# Altium PCB obc_comm.PcbDoc (part 3 of 3)
Units mm, origin at the board's own origin, x right, y up, seen from the top; angles counter-clockwise.
Board outline 95.89 x 90.17 mm, 4 copper layers (Top Signal, Ground Plane, Power Plane, Bottom Signal), stack 0.844 mm thick; 224 components, 179 nets, 944 pads, 422 vias.
Unrouted connection lines stored in the file: 347.
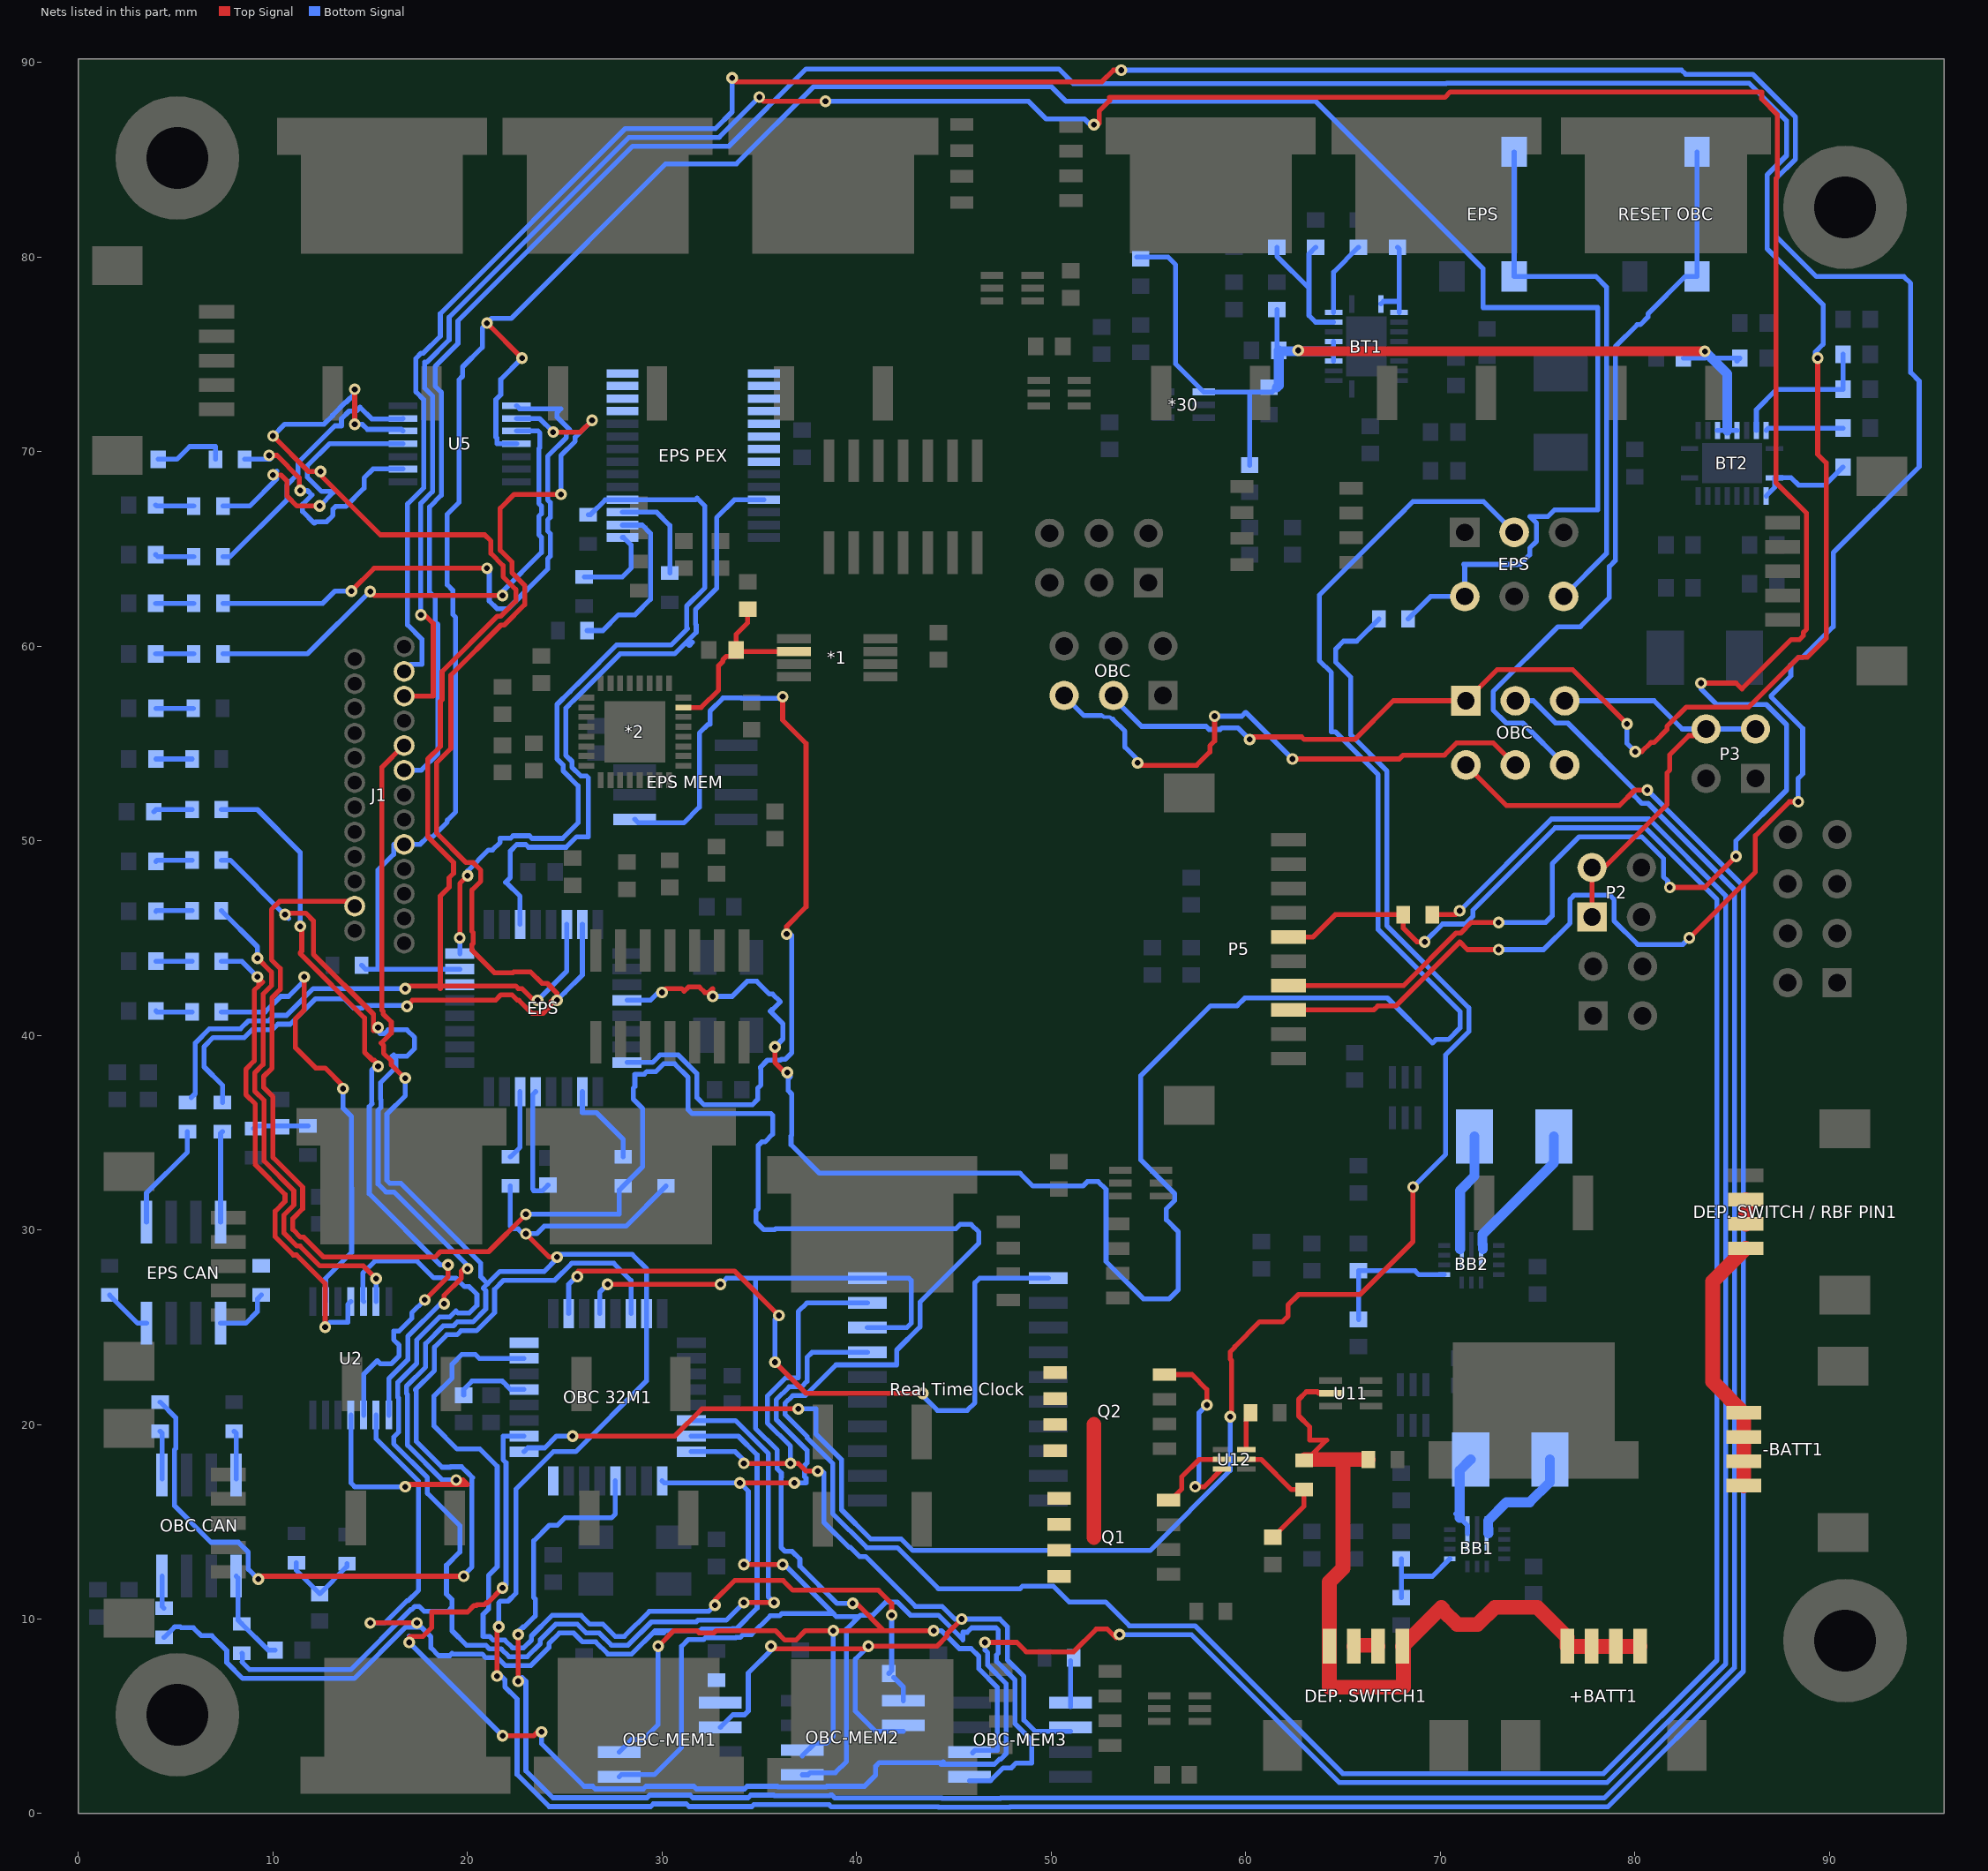
[diagram p5: the nets of this part, all layers, seen from the top]

## Via types
v1: diameter 0.6, hole 0.3, Top Signal to Bottom Signal, 390 vias
v2: diameter 1.27, hole 0.711, Top Signal to Bottom Signal, 24 vias
v3: diameter 1, hole 0.5, Top Signal to Bottom Signal, 6 vias
v4: diameter 2.794, hole 2.794, Top Signal to Bottom Signal, 2 vias

## Nets (pads, with @x,y where several pads share a name; then routed paths per layer and width w, separated by ;. In a path a pad name is that pad's centre, name@x,y a point inside that pad or via, vN(x,y) a via of type N, cw(c..) or ccw(c..) an arc to the next point about the centre after c; other vN are vias at no path point) (continued)
Net*30_4: 1.1 4.2 5.2 7.2 13.2 14.2 16.2 *30.4 BT1.14 BT1.15 BT1.16 BT2.14 BT2.15 BT2.16 | length 53.9
  Top Signal w0.508: v1(62.7,75.2) 62.75,75.15 v1(83.6,75.15)
  Bottom Signal w0.254: 14.2@54.4,80 56,80 56.4,79.6 56.4,74.502 *30.4@57.841,73.06 61.36,73.06 7.2@61.6,73.3 ; 5.2@60.2,69.3 60.2,73.06 ; 4.2@61.6,77.3 61.6,75.3 1.1@61.7,75.2 ; BT1.14@64.515,74.65 BT1.15@64.515,75.15 BT1.16@64.515,75.65 ; 16.2@82.5,74.8 83.6,74.8 ; 83.95,74.8 13.2@85.4,74.8 13.2@85.25,74.65 ; BT2.14@84.25,71.085 BT2.15@84.75,71.085 BT2.16@85.25,71.085
  Bottom Signal w0.508: 7.2@61.6,73.3 61.7,73.4 1.1@61.7,75.2 ; 1.1@61.85,75.15 v1@62.6,75.15 ; v1@62.6,75.2 v1(62.7,75.2) ; v1@62.7,75.15 BT1.15@64.515,75.15 ; v1(83.6,75.15) 83.95,74.8 84.75,74 BT2.15@84.75,71.085
Net+BATT1_1: "DEP. SWITCH1.1" "DEP. SWITCH1.4" +BATT1.1 +BATT1.2 +BATT1.3 +BATT1.4 R44.2 R45.2 U11.5 | length 42.7
  Top Signal w0.254: R45.2@63,18.15 63.05,18.2 63.163,18.2 64.163,19.2 63.281,19.2 63.281,19.882 62.719,20.444 62.719,21.282 63.118,21.681 63.682,21.681 63.763,21.6 U11.5@64.359,21.6
  Top Signal w0.762: R45.2@63.05,18.2 65,18.2 ; R44.2@66.3,18.2 65,18.2 ; +BATT1.1@80.275,8.6 +BATT1.2@79.025,8.6 +BATT1.3@77.775,8.6 +BATT1.4@76.525,8.6 76.525,9.075 75,10.6 72.796,10.6 71.916,9.72 70.864,9.72 70.12,10.464 70.12,10.53 70.05,10.6 68.05,8.6 68.1,8.55 68.1,6.5 64.3,6.5 64.3,8.6 64.3,11.9 65,12.6 65,18.2
Net-BATT1_1: "DEP. SWITCH / RBF PIN1.4" -BATT1.1 -BATT1.2 -BATT1.3 -BATT1.4 | length 13.6
  Top Signal w0.762: -BATT1.4@85.6,16.85 -BATT1.3@85.6,18.1 -BATT1.2@85.6,19.35 -BATT1.1@85.6,20.6 84,22.2 84,27.35 85.7,29.05
NetBB1_1: BB1.1 L1.2 | length 4.5
  Bottom Signal w0.254: 70.8,15.4 71,15.2 71.4,14.8 BB1.1@71.4,14.4
  Bottom Signal w0.508: 71,15.2 71,17.637 L1.2@71.563,18.2
NetBB1_3: BB1.3 L1.1 | length 5.8
  Bottom Signal w0.508: BB1.3@72.471,14.4 72.471,14.641 72.454,14.658 72.454,15.054 73.4,16 74.6,16 75.637,17.037 L1.1@75.637,18.2
NetBB1_11: BB1.11 Rfbb1.2 Rfbt1.2 | length 4.9
  Bottom Signal w0.254: Rfbb1.2@68,11.1 68,12.2 ; Rfbt1.2@68,13.1 68,12.2 ; BB1.11@70.49,13.095 69.595,12.2 68,12.2
NetBB2_1: BB2.1 L2.2 | length 6.1
  Bottom Signal w0.508: BB2.1@71.019,29 71.019,32.019 71.763,32.763 L2.2@71.763,34.8
NetBB2_3: BB2.3 L2.1 | length 7.3
  Bottom Signal w0.508: BB2.3@72.181,29 72.181,29.241 72.164,29.258 72.164,29.764 75.837,33.437 L2.1@75.837,34.8
NetBB2_11: BB2.11 Rfbb2.2 Rfbt2.2 | length 7
  Bottom Signal w0.254: Rfbb2.2@65.8,25.4 Rfbt2.2@65.8,27.9 68.7,27.9 68.905,27.695 BB2.11@70.2,27.695
NetBT1_1: BT1.1 BT1.2 CvccA1.2 | length 4.4
  Bottom Signal w0.254: BT1.1@66.95,77.585 67.08,77.715 67.885,77.715 ; CvccA1.2@67.8,80.5 67.885,80.415 67.885,77.715 ; BT1.2@67.885,77.15 67.885,77.715
NetBT1_18: BT1.18 Ccomp1.2 RcompA1.2 | length 7.9
  Bottom Signal w0.254: RcompA1.2@61.6,80.5 61.6,80.042 63.254,78.388 ; Ccomp1.2@63.6,80.5 63.254,80.154 63.254,78.388 ; BT1.18@64.515,76.65 63.592,76.65 63.254,76.988 63.254,78.388
NetBT1_19: BT1.19 RlimA1.2 | length 3.9
  Bottom Signal w0.254: BT1.19@64.515,77.15 64.515,79.215 RlimA1.2@65.8,80.5
NetBT2_1: BT2.1 BT2.2 CvccA2.2 | length 5.2
  Bottom Signal w0.254: BT2.2@86.75,67.715 87.185,68.15 BT2.1@87.185,68.65 88.037,68.65 88.418,68.269 89.769,68.269 CvccA2.2@90.7,69.2
NetBT2_18: BT2.18 Ccomp2.2 RcompA2.2 | length 7.7
  Bottom Signal w0.254: BT2.18@86.25,71.085 86.25,72.15 87.3,73.2 Ccomp2.2@90.7,73.2 RcompA2.2@90.7,75
NetBT2_19: BT2.19 RlimA2.2 | length 4
  Bottom Signal w0.254: BT2.19@86.75,71.085 86.865,71.2 RlimA2.2@90.7,71.2
NetC19_1: "OBC 32M1.21" C19.1 | length 3.8
  Bottom Signal w0.254: C19.1@19.8,21.5 19.8,21.8 20.227,22.227 21.785,22.227 22,22.012 22,22 22.2,21.8 22.9,21.8
NetC25_1: C25.1 EPS.21 | length 6
  Bottom Signal w0.254: EPS.21@23.5,37.1 23.356,36.956 23.356,32.1 23.4,32.056 23.4,32 23.833,32 C25.1@24.133,32.3
NetC33_2: C33.2 R28.2 R31.2 | length 4.2
  Bottom Signal w0.254: R28.2@11.2,12.9 11.2,12.5 C33.2@12.4,11.3 13.8,12.7 R31.2@13.8,12.85
NetC38_2: C38.2 R35.2 R38.2 | length 2.9
  Bottom Signal w0.254: R38.2@9,35.2 9.15,35.35 R35.2@11.8,35.35
NetC44_2: C44.2 R45.1 U12.5 | length 6.7
  Top Signal w0.254: U12.5@60.03,18.2 60.8,18.2 62.35,16.65 R45.1@63,16.65 63,15.8 C44.2@61.4,14.2
NetD1_2: "OBC RST.2" R2.2 | length 2
  Bottom Signal w0.254: 3.878,51.49 3.988,51.6 R2.2@5.85,51.6
NetD2_2: "OBC RXCAN.2" R3.2 | length 1.9
  Bottom Signal w0.254: 3.978,48.93 4.048,49 R3.2@5.85,49
NetD3_2: "OBC TXCAN.2" R4.2 | length 1.9
  Bottom Signal w0.254: 3.978,46.37 4.008,46.4 R4.2@5.85,46.4
NetD4_2: "OBC RX.2" "OBC TX.2"@3.978,41.25 R5.2 R6.2 | length 3.8
  Bottom Signal w0.254: 3.978,41.25 4.028,41.2 R6.2@5.85,41.2 ; 3.978,43.81 3.988,43.8 R5.2@5.85,43.8
NetD6_1: 3V3.1 R7.2 | length 1.9
  Bottom Signal w0.254: 3V3.1@3.978,54.2 R7.2@5.85,54.2
NetD7_2: "EPS RST.2" R15.2 | length 1.9
  Bottom Signal w0.254: 3.973,59.6 R15.2@5.923,59.6
NetD8_2: "EPS RXCAN.2" R16.2 | length 1.9
  Bottom Signal w0.254: 3.973,62.2 R16.2@5.923,62.2
NetD9_2: "EPS TXCAN.2" R17.2 | length 2
  Bottom Signal w0.254: 3.973,64.7 4.073,64.6 R17.2@5.923,64.6
NetD10_2: "EPS RX.2" R18.2 | length 2
  Bottom Signal w0.254: 3.973,67.25 4.023,67.2 R18.2@5.923,67.2
NetD11_2: "EPS TX.2" R19.2 | length 3.9
  Bottom Signal w0.254: 4.1,69.6 5.062,69.6 5.718,70.256 7.05,70.256 R19.2@7.05,69.6
NetD12_1: 5V.2 D12.1 | length 1.9
  Bottom Signal w0.254: D12.1@3.978,56.8 5V.2@5.9,56.8
"NetDEP. SWITCH1_2": "DEP. SWITCH1.2" "DEP. SWITCH1.3" | length 1.3
  Top Signal w0.762: 65.55,8.6 65.6,8.65 66.75,8.65 66.8,8.6
"NetDEP. SWITCH / RBF PIN1_2": "DEP. SWITCH / RBF PIN1.2" "DEP. SWITCH / RBF PIN1.3" | length 1.3
  Top Signal w0.762: 85.7,30.3 85.7,31.55
NetQ1_2: Q1.2 U12.2 | length 4
  Top Signal w0.254: Q1.2@56.025,16.105 56.025,16.203 56.24,16.203 56.719,16.682 56.719,17.319 57.6,18.2 U12.2@58.77,18.2
NetQ1_3: Q1.3 Q2.3 | length 5.8
  Top Signal w0.762: 52.2,14.2 52.2,20
NetQ2_2: Q2.2 U12.3 | length 9.5
  Top Signal w0.254: Q2.2@55.819,22.565 57.235,22.565 58,21.8 v1(58,21) ; v1(57.4,16.8) 57.87,16.8 U12.3@58.77,17.7
  Bottom Signal w0.254: v1(57.4,16.8) 57.6,17 57.6,20.6 v1(58,21)
NetR2_1: R2.1 U2.10 | length 40.9
  Top Signal w0.254: v1(11.4,45.6) 11.481,45.519 11.481,44.318 11.4,44.237 11.4,44.2 14.708,40.892 14.708,39.129 15.118,38.719 15.205,38.719 15.4,38.524 v1(15.4,38.4) ; v1(17.8,26.4) 19,27.6 v1(19,28.2)
  Bottom Signal w0.254: R2.1@7.35,51.6 9.2,51.6 11.4,49.4 v1(11.4,45.6) ; U2.10@14.66,20.479 14.66,22.576 15.36,23.276 15.518,23.119 16.082,23.119 16.481,23.518 16.481,24.082 16.2,24.363 16.2,24.8 16.203,24.803 16.484,24.803 17.133,25.452 17.133,25.733 v1(17.8,26.4) ; v1(15.4,38.4) 15.4,38.537 15.065,38.202 15.065,36.53 15.092,36.503 15.092,36.476 14.947,36.332 14.947,31.853 18.6,28.2 v1(19,28.2)
NetR3_1: R3.1 U2.8 | length 40.9
  Top Signal w0.254: v1(10.616,46.2) 10.616,46.216 10.681,46.281 11.682,46.281 12.081,45.882 12.081,44.161 15.162,41.08 15.162,40.238 15.238,40.238 v1(15.4,40.4) ; v1(18.8,26.2) 18.8,26.637 19.681,27.518 19.681,27.881 19.8,28 v1(20,28)
  Bottom Signal w0.254: R3.1@7.35,49 7.8,49 10.6,46.2 v1(10.616,46.2) 10.616,46.184 v1@10.8,46 ; v1(15.4,40.4) 15.4,40.2 15.519,40.081 15.718,40.081 15.918,40.281 16.882,40.281 17.281,39.882 17.281,39.318 16.881,38.918 16.119,38.918 ; U2.8@15.956,20.479 15.956,22.351 16.935,23.33 16.935,24.535 18.6,26.2 v1(18.8,26.2) ; 16.2,39 16.2,38.837 16.308,38.729 16.308,38.345 15.519,37.556 15.519,36.718 15.546,36.691 15.546,36.288 15.401,36.144 15.401,32.356 15.812,31.946 16.217,31.946 20,28.163 v1(20,28)
NetR4_1: R4.1 U2.6 | length 25.9
  Top Signal w0.254: v1(9.2,43.963) 9.919,43.244 9.919,42.547 9.492,42.12 9.492,38.497 9.065,38.07 9.065,37.13 9.546,36.649 9.546,33.533 11.07,32.009 11.07,31.275 10.565,30.77 10.565,29.83 11.23,29.165 11.393,29.165 12.412,28.146 14.645,28.146 v1(15.295,27.495)
  Bottom Signal w0.254: R4.1@7.35,46.4 9.2,44.55 v1(9.2,43.963) ; U2.6@15.295,26.321 v1(15.295,27.495)
NetR5_1: R5.1 U2.4 | length 25.3
  Top Signal w0.254: v1(9.2,43) 9.465,42.735 9.384,42.654 9.277,42.654 9.277,42.547 9.038,42.308 9.038,38.685 8.611,38.258 8.611,36.942 9.092,36.461 9.092,33.345 10.616,31.821 10.616,31.463 10.111,30.958 10.111,29.642 11.042,28.711 11.205,28.711 12.679,27.237 v1(12.679,25)
  Bottom Signal w0.254: R5.1@7.35,43.8 8.4,43.8 v1(9.2,43) ; v1(12.679,25) 12.936,25.257 13.844,25.257 13.844,26.165 U2.4@14,26.321
NetR6_1: R6.1 U2.2 | length 24
  Top Signal w0.254: 11.152,39.352 11.152,40.836 11.6,41.284 v1(11.6,43) ; 11.158,39.358 12.194,38.322 12.678,38.322 13.6,37.4 v1(13.6,37.258)
  Bottom Signal w0.254: R6.1@7.35,41.2 9.6,41.2 10.4,42 10.8,42 11.6,42.8 v1(11.6,43) ; U2.2@12.705,26.321 12.705,27.505 14.039,28.839 14.039,32.147 14.031,32.156 14.031,35.823 13.6,36.255 v1(13.6,37.258)
NetR8_2: "OBC 32M1.17" R8.2 | length 99.8
  Top Signal w0.254: v1(25.4,19.4) 30.647,19.4 32.047,20.8 v1(37,20.8) ; v1(59.2,20.4) 59.281,20.481 59.281,23.282 59.2,23.363 59.2,23.726 59.437,23.963 59.437,24 60.718,25.281 61.893,25.281 62.177,25.565 62.177,26.14 62.718,26.681 65.881,26.681 68.6,29.4 v1(68.6,32.2)
  Bottom Signal w0.254: 22.9,18.6 23.098,18.798 23.968,18.798 24.57,19.4 v1(25.4,19.4) ; v1(37,20.8) 37.908,20.8 37.908,19.505 39.223,18.19 39.223,15.614 40.714,14.123 42.282,14.123 42.886,13.519 55.082,13.519 59.2,17.637 v1(59.2,20.4) ; R8.2@66.85,61.4 65.704,60.254 65.109,60.254 65.027,60.254 64.628,59.855 64.628,59.172 65.4,58.4 65.4,55.442 67.254,53.588 67.254,45.625 71.47,41.409 71.47,40.191 70.278,38.999 70.278,33.878 v1(68.6,32.2)
NetR9_2: "OBC 32M1.18" R9.2 | length 160.7
  Top Signal w0.254: v1(17,8.8) 17,9.053 17.055,9.108 17.708,9.108 18.162,9.562 18.162,10.362 19.999,10.362 20.337,10.7 20.458,10.7 20.493,10.735 20.869,10.735 20.988,10.854 21.021,10.821 v1(21.8,11.6) ; v1(21.8,4) 23.4,4 23.6,4.2 v1(23.8,4.2) ; v1(46.6,8.8) 48.237,8.8 48.718,8.319 51.156,8.319 52.318,9.481 52.882,9.481 53.336,9.027 v1(53.509,9.2) ; R9.2@69.6,46.2 70.8,46.2 v1(71,46.4)
  Bottom Signal w0.254: 17,9.126 v1(17,8.8) v1(21.8,4) ; v1(21.8,11.6) 21.977,11.777 21.977,18.035 21.823,18.19 21.823,19.4 22.9,19.4 ; v1(23.8,4.2) 23.8,3.6 25.994,1.406 26.427,1.406 26.565,1.268 29.035,1.268 29.173,1.406 31.627,1.406 31.765,1.268 34.235,1.268 34.302,1.335 34.373,1.406 35.927,1.406 35.965,1.368 38.435,1.368 38.473,1.406 40.406,1.406 40.973,1.973 40.973,2.43 41.165,2.622 44.422,2.622 44.451,2.651 ; 44.338,2.538 47.081,2.538 47.351,2.808 47.415,2.808 47.681,3.074 47.681,6.682 46.735,7.628 46.735,8.27 46.6,8.405 v1(46.6,8.8) ; v1(53.509,9.2) 57.2,9.2 64.8,1.6 78.58,1.6 84.67,7.69 84.67,47.174 80.731,51.113 75.713,51.113 v1(71,46.4)
NetR10_2: "EPS PEX.18" EPS.32 R10.2 | length 39.4
  Top Signal w0.254: v1(19.6,45) 19.6,47.8 v1(20,48.2)
  Bottom Signal w0.254: EPS.32@19.6,44.2 v1(19.6,45) ; v1(20,48.2) 20,48.442 21.077,49.519 21.282,49.519 21.681,49.918 21.681,50.123 22.212,50.123 22.343,50.254 23.183,50.254 23.318,50.119 24.882,50.119 25.681,50.918 25.681,52.823 24.915,53.588 24.915,53.885 24.6,54.2 24.6,57 25.265,57.665 25.27,57.665 25.935,58.33 25.935,58.335 27.654,60.054 30.454,60.054 31.297,60.897 31.265,60.93 31.265,62.07 32.2,63.005 32.2,67.2 31.8,67.6 31.714,67.514 27.968,67.514 27.077,67.514 26.313,66.75 R10.2@26.2,66.75
NetR11_2: "EPS PEX.15" R11.2 | length 4.4
  Bottom Signal w0.254: R11.2@26,63.55 27.95,63.55 28.4,64 28.4,65.2 28.016,65.584 27.968,65.584
NetR12_2: "EPS PEX.16" R12.2 | length 8.9
  Bottom Signal w0.254: R12.2@26.15,60.8 26.958,60.8 27.77,61.612 28.612,61.612 29.4,62.4 29.4,65.8 28.981,66.219 27.968,66.219
NetR13_2: "EPS PEX.17" R13.2 | length 5.2
  Bottom Signal w0.254: 27.968,66.879 29.721,66.879 30.4,66.2 R13.2@30.4,63.75
NetR15_1: R15.1 U5.10 | length 26.4
  Top Signal w0.254: v1(15,62.8) 15.2,62.6 v1(21.8,62.6)
  Bottom Signal w0.254: R15.1@7.423,59.6 11.763,59.6 14.963,62.8 v1(15,62.8) ; v1(21.8,62.6) 21.8,62.805 23.8,64.805 23.8,65.595 23.665,65.73 23.665,66.67 23.8,66.805 23.8,67.195 23.665,67.33 23.665,70.149 23.719,70.203 23.719,70.956 23.615,71.06 U5.10@22.521,71.06
NetR16_1: R16.1 U5.8 | length 31.7
  Top Signal w0.254: v1(14.033,62.833) 15.2,64 v1(21,64)
  Bottom Signal w0.254: R16.1@7.423,62.2 12.558,62.2 13.19,62.833 v1(14.033,62.833) ; v1(21,64) 21.119,63.881 21.119,62.318 21.518,61.919 22.082,61.919 24.119,63.956 24.119,64.482 24.254,64.617 24.254,65.783 24.119,65.918 24.119,66.482 24.254,66.617 24.254,67.383 24.119,67.518 24.119,69.756 25.081,70.718 25.081,70.923 25.254,71.096 25.254,71.109 24.602,71.761 24.602,72.003 24.8,72.2 22.677,72.2 U5.8@22.521,72.356
NetR17_1: R17.1 U5.6 | length 13.7
  Bottom Signal w0.254: R17.1@7.423,64.6 7.8,64.6 10.719,67.519 10.719,68.282 11.281,68.844 11.281,69.417 13.183,71.319 13.519,71.319 13.519,71.682 13.918,72.081 14.281,72.081 14.474,72.274 15.074,71.675 16.658,71.675 U5.6@16.679,71.695
NetR18_1: R18.1 U5.4 | length 16.4
  Top Signal w0.254: v1(10,68.8) 10.4,68.8 10.719,68.481 10.719,67.718 11.237,67.2 v1(12.4,67.2)
  Bottom Signal w0.254: R18.1@7.423,67.2 8.8,67.2 10.2,68.6 v1(10,68.8) ; v1(12.4,67.2) 13.119,67.919 13.092,67.946 12.498,67.946 11.757,68.687 11.757,69.251 12.906,70.4 U5.4@16.679,70.4 ; v1(10,68.8) 10.2,69 v1(10,68.8)
  other v1: 10,68.8
NetR19_1: R19.1 U5.2 | length 13.1
  Top Signal w0.254: v1(9.8,69.8) 10.2,69.8 11.35,68.65 11.35,68.05 v1(11.4,68)
  Bottom Signal w0.254: R19.1@8.55,69.6 9.837,69.6 v1@9.918,69.681 ; v1(9.8,69.8) v1@9.919,69.681 ; v1(11.4,68) 11.763,68 12,67.763 11.519,67.282 11.519,66.918 12.118,66.319 12.124,66.319 12.194,66.389 12.752,66.389 13.081,66.718 13.081,67.044 13.221,67.184 13.747,67.184 14.681,68.118 14.681,68.644 15.142,69.105 U5.2@16.679,69.105
NetR25_2: EPS.18 R25.2 | length 4.6
  Bottom Signal w0.254: EPS.18@25.9,37.1 25.9,36.023 26.619,36.023 28,34.642 R25.2@28,33.75
NetR26_2: EPS.22 R26.2 | length 3.6
  Bottom Signal w0.254: R26.2@22.2,33.75 22.7,34.25 EPS.22@22.7,37.1
NetR27_1: "OBC CAN.4" R27.1 | length 1.7
  Bottom Signal w0.254: 4.295,12.2 4.295,10.655 R27.1@4.4,10.55
NetR29_1: "OBC CAN.1" C34.2 R29.1 | length 4.8
  Bottom Signal w0.254: 8.105,12.2 8.2,12.105 8.2,9.95 R29.1@8.4,9.75 9.75,8.4 C34.2@10.1,8.4
NetR30_1: "OBC CAN.5" R30.1 | length 2.5
  Bottom Signal w0.254: R30.1@4.2,19.65 4.295,19.555 4.295,17.2
NetR30_2: "OBC 32M1.30" R30.2 | length 51.6
  Top Signal w0.254: v1(9.247,12.047) 9.4,12.2 v1(19.8,12.2)
  Bottom Signal w0.254: R30.2@4.2,21.15 5,20.35 5,18.759 4.938,18.697 4.938,15.82 6.812,13.946 8.221,13.946 8.732,13.435 8.732,12.562 v1(9.247,12.047) ; v1(19.8,12.2) 19.8,12.247 20.227,12.674 20.227,17.227 20.261,17.261 20.096,17.426 19.697,17.825 19.133,17.825 19.108,17.8 18.689,17.8 17.369,19.121 17.369,21.727 17.318,21.778 17.318,21.787 18.297,22.766 18.297,23.971 18.937,24.611 19.458,24.611 19.658,24.811 20.458,24.811 21.389,25.742 21.389,26.947 21.853,27.411 24.486,27.411 25.356,28.281 27.519,28.281 28.4,27.4 28.4,25.7
NetR32_2: "OBC CAN.8" R32.2 | length 2.5
  Bottom Signal w0.254: R32.2@8,19.65 8.105,19.545 8.105,17.2
NetR33_U_obc_flash1_1: 22.1 "OBC 32M1.24" OBC-MEM1.1
NetR33_U_obc_flash2_1: "OBC 32M1.23" OBC-MEM2.1 R33.1 | length 50.1
  Top Signal w0.254: v1(32.719,10.719) 32.719,10.966 33.73,11.977 36.228,11.977 36.724,11.481 41.119,11.481 41.8,10.8 v1(41.8,10.2)
  Bottom Signal w0.254: 22.9,23.4 20.6,23.4 20.4,23.6 19.708,23.6 19.205,23.097 19.205,22.39 18.277,21.461 18.277,19.923 19.467,18.733 20.638,18.733 21.523,17.847 21.523,12.686 21.081,12.244 21.081,10.518 20.8,10.237 20.8,9.108 21.129,9.108 21.318,8.919 21.918,8.919 22.318,8.519 22.882,8.519 23.281,8.918 23.281,9.128 24.342,10.189 25.837,10.189 26.291,9.735 26.962,9.735 27.589,9.108 28.061,9.108 29.346,10.393 32.393,10.393 v1(32.719,10.719) ; R33.1@41.65,7.2 41.8,7.35 v1(41.8,10.2) ; R33.1@41.9,7 42.4,6.5 OBC-MEM2.1@42.4,5.805
NetR33_U_obc_flash3_1: 20.2 "OBC 32M1.16" OBC-MEM3.1 | length 2.3
  Bottom Signal w0.254: OBC-MEM3.1@51,5.505 20.2@51,7.85
NetR34_1: "EPS CAN.4" R34.1 | length 4.7
  Bottom Signal w0.254: 7.305,30.4 7.305,34.955 R34.1@7.4,35.05
NetR34_2: EPS.7 R34.2 U5.9 | length 73.2
  Top Signal w0.254: v1(16.884,41.484) 16.884,41.322 16.83,41.376 16.83,41.467 17.163,41.8 21.437,41.8 21.718,42.081 22.282,42.081 22.563,41.8 22.637,41.8 23.318,41.119 23.882,41.119 24.281,41.518 24.281,41.718 24.363,41.8 v1(24.6,41.8) 24.6,42.163 24.098,42.665 23.83,42.665 23.23,43.265 22.378,43.265 22.324,43.211 21.384,43.211 20.227,44.368 20.227,44.664 20.281,44.718 20.281,45.282 20.227,45.336 20.227,47.464 20.681,47.918 20.681,48.482 20.282,48.881 19.924,48.881 18.4,50.405 18.4,54 19.143,54.743 19.143,58.506 21.718,61.081 21.886,61.081 22.935,62.13 22.935,63.123 22.277,63.78 22.277,64.328 21.681,64.924 21.681,67.081 22.4,67.8 v1(24.8,67.8) ; v1(24.4,71) 25.8,71 v1(26.4,71.6)
  Bottom Signal w0.254: R34.2@7.4,36.55 7.4,37.437 6.454,38.383 6.454,39.412 6.923,39.881 8.523,39.881 8.934,40.292 9.976,40.292 10.254,40.57 10.886,40.57 12.194,41.878 13.666,41.878 14.144,41.4 14.595,41.4 14.73,41.535 16.833,41.535 v1(16.884,41.484) ; U5.9@22.521,71.695 23.705,71.695 v1(24.4,71) ; v1(24.6,41.8) 25,42.2 25.9,43.1 EPS.7@25.9,45.7 ; v1(24.8,67.8) 24.8,69.795 25.535,70.53 25.535,70.735 v1(26.4,71.6)
NetR36_1: "EPS CAN.1" R36.1 | length 5.5
  Bottom Signal w0.254: 3.495,30.4 3.495,31.895 5.6,34 R36.1@5.6,35.05
NetR36_2: EPS.6@25.1,45.7 R36.2 U5.5 | length 76.4
  Top Signal w0.254: v1(10,70.8) 11.831,68.969 v1(12.438,68.969) 12.438,68.804 15.523,65.719 20.881,65.719 21.2,65.4 21.2,64.763 21.823,64.14 21.823,63.565 22.481,62.907 22.481,62.318 21.698,61.535 21.53,61.535 18.689,58.694 18.689,57.247 18.6,57.158 18.6,54.842 17.946,54.188 17.946,50.217 19.281,48.882 19.281,48.318 19.054,48.091 19.054,47.612 18.6,47.158 18.6,42.4 ; v1(14.2,71.4) v1(14.2,73.2) ; v1(16.8,42.4) 16.935,42.535 22.47,42.535 22.605,42.4 22.8,42.4 23.4,41.8 v1(23.6,41.8)
  Bottom Signal w0.254: R36.2@5.8,36.8 6,37 6,39.6 6.735,40.335 8.335,40.335 8.746,40.746 9.788,40.746 10.066,41.024 10.698,41.024 12.074,42.4 v1(16.8,42.4) ; v1(10,70.8) 10.6,71.4 12.622,71.4 13.065,71.843 13.065,71.87 13.73,72.535 13.757,72.535 14.2,72.978 v1(14.2,73.2) ; v1(12.438,68.969) v1@12.631,68.969 ; v1(14.2,71.4) 14.589,71.4 14.851,71.138 16.601,71.138 U5.5@16.679,71.06 ; v1(23.6,41.8) 25.1,43.3 EPS.6@25.1,45.7
NetR37_1: "EPS CAN.5" R37.1 | length 3.1
  Bottom Signal w0.254: 7.305,25.2 8.6,25.2 9.2,25.8 9.2,26.45 R37.1@9.4,26.65
NetR37_2: EPS.30 R37.2
NetR39_2: "EPS CAN.8" R39.2 | length 2.5
  Bottom Signal w0.254: R39.2@1.6,26.65 3.05,25.2 3.495,25.2
NetR47_2: R47.2 U12.6 | length 1.8
  Top Signal w0.254: U12.6@60.03,18.7 60.03,20.257 R47.2@60.173,20.4
NetS1_6: "RESET OBC.1" OBC.6@76.4,53.889 | length 39
  Bottom Signal w0.254: OBC.6@76.4,53.889 74.241,56.048 73.387,56.048 72.717,56.718 72.717,57.664 76.053,61 77.2,61 78.692,62.492 78.692,64.093 79,64.401 79,75.4 80.119,76.519 80.282,76.519 80.681,76.918 80.681,77.081 82.6,79 83.2,79 83.2,85.4
NetS3_2: EPS.2@73.8,65.851 EPS.12 | length 113.7
  Top Signal w0.254: v1(30,42.2) 30.2,42.4 31,42.4 31.137,42.263 31.355,42.481 31.919,42.481 32.2,42.2 32.4,42.2 32.6,42.4 v1(32.6,42) ; v1(35.8,39.4) 35.8,38.6 36.438,37.962 36.476,38 36.438,38.038 v1(36.438,38.088)
  Bottom Signal w0.254: EPS.12@28.2,41.8 29.4,41.8 29.8,42.2 v1(30,42.2) ; v1(32.6,42) 33.6,42 34.373,42.773 34.864,42.773 35.518,42.119 35.68,42.119 36.081,41.718 35.682,41.319 35.644,41.319 35.562,41.238 36.211,40.589 36.211,39.811 v1(35.8,39.4) ; v1(36.438,38.088) 36.438,38.038 36.6,37.876 36.481,37.757 36.481,37.161 36.665,36.977 36.665,34.86 36.627,34.822 36.627,34.373 38.092,32.908 48.4,32.908 49.054,32.254 51.63,32.254 51.857,32.481 52.421,32.481 52.82,32.082 52.82,28.375 54.741,26.454 56.059,26.454 56.535,26.93 56.535,29.902 55.919,30.518 55.919,31.082 56.351,31.514 56.351,31.849 54.6,33.6 54.6,37.921 58.198,41.519 59.556,41.519 59.958,41.921 67.279,41.921 69.6,39.6 69.784,39.784 70.421,39.784 71.016,40.379 71.016,41.221 66.8,45.437 66.8,53.4 64.6,55.6 64.401,55.6 64.401,58.636 63.781,59.256 63.781,62.619 67.373,66.211 67.375,66.211 68.189,67.025 68.189,67.027 68.6,67.438 72.213,67.438 EPS.2@73.8,65.851
NetS3_6: EPS.1@73.8,79 EPS.1@73.8,85.4 EPS.6@76.34,62.549 | length 28.2
  Bottom Signal w0.254: EPS.1@73.8,85.4 EPS.1@73.8,79 78,79 78.546,78.454 78.546,64.755 EPS.6@76.34,62.549
NetU1_8: "OBC 32M1.8" "Real Time Clock.19" OBC-MEM1.2 OBC-MEM2.2 OBC-MEM3.2 | length 65.1
  Top Signal w0.254: v1(34.2,18) v1(36.6,18) 37,18 37.4,17.6 v1(38,17.6) ; v1(35.6,8.6) 35.735,8.465 40.465,8.465 v1(40.6,8.6) 44.122,8.6 44.64,9.118 44.64,9.24 v1(45.4,10)
  Bottom Signal w0.254: 31.5,18.6 33.758,18.6 34.2,18.158 v1(34.2,18) ; OBC-MEM1.2@33,4.435 33.643,5.078 34.235,5.078 34.427,5.27 34.427,7.227 35.6,8.4 v1(35.6,8.6) ; v1(36.6,18) 36.6,18.886 35.411,20.075 35.411,21.458 36.342,22.389 36.984,22.389 37,22.405 37,25.8 37.445,26.245 40.55,26.245 ; v1(38,17.6) 38.23,17.6 38.315,17.515 38.315,14.98 39.614,13.681 39.682,13.681 40.148,13.215 40.457,13.215 43.018,10.654 44.393,10.654 45.047,10 v1(45.4,10) 47.358,10 47.747,9.611 47.747,7.9 48.6,7.047 48.6,4.8 49.165,4.235 OBC-MEM3.2@51,4.235 ; v1(40.6,8.6) 39.935,7.935 39.935,5.265 40.965,4.235 OBC-MEM2.2@42.4,4.235
NetU1_9: "OBC 32M1.9" "Real Time Clock.17" OBC-MEM1.5 OBC-MEM2.5 OBC-MEM3.5 | length 78.3
  Top Signal w0.254: v1(34,17) v1(36.8,17) ; v1(34.2,12.8) v1(36.2,12.8)
  Bottom Signal w0.254: OBC-MEM1.5@27.8,1.895 27.905,2 29.6,2 31,3.4 31,8.6 31.346,8.946 32.134,8.946 32.215,9.027 33.464,9.027 33.468,9.031 33.789,9.031 33.812,9.054 34.017,9.054 34.163,9.2 34.595,9.2 35.556,10.161 36.04,10.161 36.16,10.281 38.8,10.281 ; 30,17.1 30.1,17 v1(34,17) 34.427,16.573 34.427,13.027 v1(34.2,12.8) ; v1(36.2,12.8) 36.281,12.8 38.8,10.281 ; v1(36.8,17) 37.4,17 37.4,17.237 37.319,17.318 37.319,17.882 37.454,18.017 37.454,18.674 35.865,20.264 35.865,21.27 36.53,21.935 37.172,21.935 37.454,22.217 37.454,23.454 37.705,23.705 40.55,23.705 ; OBC-MEM2.5@37.2,1.995 37.5,1.995 37.605,2.1 38.9,2.1 39.481,2.681 39.481,9.481 40.2,10.2 ; OBC-MEM3.5@45.8,1.695 46.88,1.695 47.539,2.354 47.954,2.354 48.2,2.6 49,2.6 49,3.758 48.146,4.612 48.146,6.859 47.189,7.816 47.189,8.156 47.281,8.248 47.281,9.435 47.17,9.546 45.909,9.546 45.682,9.319 45.47,9.319 45.47,8.935 44.205,10.2 42.763,10.2 42.082,10.881 41.518,10.881 40.837,10.2 40.2,10.2 ; 38.8,10.281 38.962,10.119 40.119,10.119 40.2,10.2
NetU1_26: "OBC 32M1.26" "Real Time Clock.1" | length 37.8
  Top Signal w0.254: v1(25.638,27.6) 25.8,27.762 25.681,27.881 33.719,27.881 v1(36,25.6) ; v1(35.8,23.2) 37.4,21.6 v1(43.4,21.6)
  Bottom Signal w0.254: 25.2,25.7 25.2,27.2 25.619,27.619 v1(25.638,27.6) ; v1(35.8,23.2) 35.8,25.4 v1(36,25.6) ; v1(43.4,21.6) 43.4,21.474 44.155,20.719 45.682,20.719 46.081,21.118 46.081,27.281 46.315,27.515 49.85,27.515
NetU1_28: "OBC 32M1.28" "Real Time Clock.18" "Real Time Clock.20" OBC-MEM1.6 OBC-MEM2.6 OBC-MEM3.6 | length 82.1
  Top Signal w0.254: v1(27.2,27.2) v1(33,27.2) ; v1(29.8,8.6) 30.6,9.4 31.791,9.4 31.907,9.283 32.66,9.283 32.776,9.4 35.837,9.4 36.318,8.919 36.882,8.919 37.363,9.4 v1(38.8,9.4) 41.4,9.4 ; v1(39.8,10.8) 40,10.8 41.4,9.4 ; v1(43.959,9.4) 41.4,9.4
  Bottom Signal w0.254: 26.8,25.7 26.8,26.8 v1(27.2,27.2) ; OBC-MEM1.6@27.8,3.165 28.443,3.808 29.035,3.808 29.8,4.573 v1(29.8,8.6) ; v1(33,27.2) 33.315,27.515 40.55,27.515 42.685,27.515 42.8,27.4 42.8,25.2 42.575,24.975 40.55,24.975 ; 34.8,27.515 34.8,19.805 35.919,18.686 35.919,17.718 36.131,17.506 36.131,17.294 36.119,17.282 36.119,13.681 36.319,13.481 36.682,13.481 37.081,13.082 37.081,12.719 39,10.8 v1(39.8,10.8) ; OBC-MEM2.6@37.2,2.965 37.843,3.608 38.435,3.608 38.8,3.973 v1(38.8,9.4) ; v1(43.959,9.4) 44.363,9.4 45.282,8.481 45.882,8.481 46.281,8.082 46.281,7.44 47.227,6.494 47.227,3.262 46.097,3.262 OBC-MEM3.6@45.962,3.127
NetU3_1: "EPS PEX.1"
NetU3_2: "EPS PEX.2"
NetU3_3: "EPS PEX.3"
NetU3_4: "EPS PEX.4"
NetU3_5: "EPS PEX.5"
NetU3_6: "EPS PEX.6"
NetU3_7: "EPS PEX.7"
NetU3_8: "EPS PEX.8"
NetU3_11: "EPS PEX.11" EPS.3@22.7,45.7 | length 34.1
  Bottom Signal w0.254: EPS.3@22.7,45.7 22.7,47.142 21.988,47.854 21.946,47.854 22.2,48.108 22.2,49.469 22.531,49.8 22.995,49.8 23.13,49.665 25.07,49.665 25.605,50.2 26.2,50.2 26.2,53.242 26.123,53.319 25.827,53.319 25.369,53.777 25.369,54.073 25.054,54.388 25.054,56.812 25.453,57.211 25.458,57.211 26.389,58.142 26.389,58.147 27.842,59.6 30.642,59.6 31.751,60.709 31.751,61.085 31.719,61.118 31.719,61.882 32.8,62.963 32.8,66.6 33.714,67.514 35.232,67.514 ; 31.239,60.197 31.4,60.037 31.563,60.2 31.242,60.2
NetU3_25: "EPS PEX.25"
NetU3_26: "EPS PEX.26"
NetU3_27: "EPS PEX.27"
NetU3_28: "EPS PEX.28"
NetU4_16: "EPS MEM.1" EPS.16 | length 44.9
  Top Signal w0.254: v1(36.2,57.4) 36.2,56.2 37.4,55 37.4,46.595 36.4,45.595 v1(36.4,45.2)
  Bottom Signal w0.254: EPS.16@28.2,38.6 29.504,38.6 29.893,38.989 30.833,38.989 31.789,38.033 31.789,36.799 32.165,36.423 34.635,36.423 34.919,36.706 34.919,37.282 35.081,37.444 35.081,38.282 35.054,38.309 35.054,38.355 35.418,38.719 36.082,38.719 36.132,38.769 36.332,38.769 36.665,39.102 36.665,45.135 36.6,45.2 v1(36.4,45.2) ; 28.6,51.095 28.776,50.919 31.119,50.919 31.919,51.719 31.919,55.528 32.377,55.986 32.454,55.986 32.465,55.997 32.465,56.67 33.13,57.335 34.07,57.335 34.086,57.319 36.119,57.319 v1(36.2,57.4)
OBC_PGM_RST: OBC.5 | length 29.4
  Top Signal w0.254: v1(58.4,56.4) 58.4,55.123 58.157,54.881 58.157,54.557 57.477,53.877 v1@54.569,53.877 ; v1(62.4,54.2) 67.892,54.2 68.092,54.4 70.215,54.4 70.847,55.032 72.717,55.032 OBC.5@73.86,53.889 ; v1(54.446,54) v1@54.569,53.877 ; v1(54.446,54) v1@54.569,53.877 ; v1(54.446,54) v1@54.569,53.877
  Bottom Signal w0.203: 52.659,56.4 52.706,56.354 53.023,56.354 53.131,56.246 53.167,56.246
  Bottom Signal w0.254: OBC.5@50.66,57.46 51.69,56.43 52.57,56.43 ; 53.167,56.246 53.789,55.624 53.789,54.811 54.446,54.154 v1(54.446,54) ; v1(58.4,56.4) 59.8,56.4 60,56.6 v1(62.4,54.2)
OBC_RX: OBC.3@76.4,57.191 P2.1 P2.3 P3.3 P3.4 | length 23.2
  Top Signal w0.254: P2.1@77.8,46.08 P2.3@77.8,48.62 78.42,48.62 81.649,51.849 81.649,53.479 81.8,53.63 81.8,54.42 82.78,55.4 83.32,55.4 P3.4@83.66,55.74
  Bottom Signal w0.254: OBC.3@76.4,57.191 80.989,57.191 82.44,55.74 P3.3@86.2,55.74
OBC_SCK_A: J1.8 OBC.1@71.32,57.191 OBC.3@53.2,57.46 | length 172.9
  Top Signal w0.254: v1(60.2,55.2) 60.335,55.335 62.87,55.335 63.005,55.2 65.6,55.2 67.591,57.191 OBC.1@71.32,57.191 72.929,58.8 76.8,58.8 v1(79.6,56) ; v1(80.022,54.578) 80.359,54.578 80.827,55.046 80.988,55.046 81.649,55.707 81.649,55.868 82.652,56.871 85.858,56.871 88.418,59.431 88.873,59.431 89.835,60.393 89.835,69.42 89.4,69.855 v1(89.4,74.8)
  Bottom Signal w0.254: J1.8@16.74,53.625 17.625,53.625 18.481,54.481 18.481,61.103 18.33,61.254 18.33,62.496 18.049,62.778 18.049,67.153 18.651,67.755 18.651,73.045 18.33,73.366 18.33,74.372 19.508,75.55 19.508,76.713 28.488,85.693 33.443,85.693 37.408,89.659 50.388,89.659 51.139,88.908 70.303,88.908 70.33,88.935 85.865,88.935 87.8,87 87.8,85.211 86.8,84.211 86.8,80.427 89.681,77.546 89.681,75.518 89.282,75.119 89.282,74.918 v1(89.4,74.8) ; OBC.3@53.2,57.46 53.2,57.319 54.644,55.875 57.962,55.875 58.118,55.719 58.682,55.719 58.763,55.8 59.6,55.8 v1(60.2,55.2) ; v1(79.6,56) 79.6,55 v1(80.022,54.578)
PAY_MOSI_A: J1.11 P5.4 | length 175.5
  Top Signal w0.254: J1.11@16.74,57.435 18.235,57.435 18.235,61.165 17.8,61.6 v1(17.6,61.6) ; v1(35,88.214) 35.214,88 v1(38.4,88) ; v1(52.2,86.8) 52.4,86.8 52.473,86.873 52.473,87.507 53,88.034 53,88.2 70.237,88.2 70.518,88.481 86.519,88.481 86.519,88.123 87.327,87.315 87.327,84.096 87.254,84.023 87.254,68.408 88.827,66.835 88.827,60.865 88.668,60.706 88.668,60.544 88.464,60.339 88.042,60.339 85.503,57.8 85.203,58.1 v1(83.4,58.1) ; P5.4@62.2,42.55 68.108,42.55 70.812,45.254 71.054,45.254 71.6,45.8 v1(73,45.8) ; v1(81.8,47.6) 83.6,47.6 v1(85.2,49.2)
  Bottom Signal w0.254: v1(17.6,61.6) 17.595,61.605 17.595,67.341 18.197,67.943 18.197,72.857 17.8,73.254 17.8,74.6 17.916,74.6 19.054,75.738 19.054,76.901 28.3,86.147 32.934,86.147 v1(35,88.214) ; v1(38.4,88) 48.837,88 49.745,87.092 51.708,87.092 52,86.8 v1(52.2,86.8) ; v1(73,45.8) 75.421,45.8 75.761,46.14 75.761,48.823 77.143,50.205 80.354,50.205 81.471,49.088 81.471,48.152 81.689,47.934 81.689,47.489 v1(81.8,47.6) ; v1(83.4,58.1) 83.4,57.8 84.2,57 86.758,57 87.8,55.958 87.8,52.6 85.2,50 v1(85.2,49.2)
PAY_SCK_A: J1.12 P5.3 | length 178.4
  Top Signal w0.254: v1(33.6,89.2) 33.8,89 52.6,89 53.2,89.6 v1(53.6,89.6) ; P5.3@62.2,41.3 66.576,41.3 66.784,41.508 67.708,41.508 71,44.8 71.4,44.4 v1(73,44.4) ; v1(82.8,45) 86.2,48.4 86.2,50.259 87.941,52 v1(88.4,52)
  Bottom Signal w0.254: J1.12@16.74,58.705 17.096,59.061 17.654,59.061 17.654,60.354 16.919,61.089 16.919,67.307 17.743,68.131 17.743,72.669 17.346,73.066 17.346,74.788 17.612,75.054 17.728,75.054 18.6,75.926 18.6,77.089 28.112,86.601 32.746,86.601 33.6,87.456 v1(33.6,89.2) ; v1(53.6,89.6) 82.4,89.6 82.611,89.389 86.053,89.389 88.254,87.188 88.254,85.023 87.254,84.023 87.254,81.077 89.337,78.994 93.828,78.994 94.181,78.641 94.181,74.056 94.616,73.621 94.616,69.216 90.2,64.8 90.2,61 88.631,59.431 88.418,59.431 88.019,59.032 88.019,58.468 87,57.449 87,57.4 88.631,55.769 88.631,53.431 88.4,53.2 v1(88.4,52) ; v1(73,44.4) 75.305,44.4 76.669,45.764 76.669,46.988 76.892,47.211 78.708,47.211 78.931,46.988 78.931,45.89 80.15,44.671 82.471,44.671 v1(82.8,45)
REF2V5: *1.6 *2.31 C3.2 C4.1 | length 9.7
  Top Signal w0.254: *2.31@31.089,56.845 32.008,56.845 32.907,57.744 32.907,58.994 33.127,59.215 33.127,59.298 33.306,59.477 33.87,59.477 33.873,59.473 C4.1@34,59.6 ; C4.1@33.8,59.8 C4.1@33.875,59.725 ; C3.2@34.4,61.9 34.4,61.2 33.8,60.6 33.8,59.725 *1.6@36.177,59.725
RST: "OBC 32M1.31" J1.9 OBC.4@71.32,53.889 R1.1 R26.1 U2.11 | length 234.3
  Top Signal w0.254: J1.9@16.74,54.895 16.717,54.895 15.6,53.778 15.6,41.284 15.665,41.219 15.665,41.098 16.081,40.682 16.081,40.118 15.563,39.6 15.682,39.481 15.682,39.081 16.081,38.682 16.081,38.481 16.762,37.8 v1(16.8,37.8) ; v1(16.8,16.8) 16.917,16.917 19.999,16.917 ; v1(19.415,17.144) 19.773,17.144 20,16.917 ; v1(21.519,7.071) 21.519,9.519 v1(21.6,9.6) ; v1(23,29.8) 24.2,28.6 v1(24.6,28.6) ; OBC.4@71.32,53.889 73.409,51.8 79.2,51.8 80,52.6 v1(80.642,52.6)
  Bottom Signal w0.254: U2.11@14,20.479 14,17 14.2,16.8 v1(16.8,16.8) ; v1(16.8,37.8) 16.8,36.9 15.855,35.956 15.855,32.544 16,32.4 16.563,32.4 20.681,28.282 20.681,27.584 21.033,27.233 ; v1(19.415,17.144) 18.703,17.144 16.915,18.933 16.915,21.539 16.864,21.59 16.864,21.975 17.843,22.954 17.843,24.159 18.749,25.065 19.27,25.065 19.47,25.265 20.27,25.265 20.935,25.93 20.935,26.87 20.803,27.003 21.033,27.233 ; v1(21.519,7.071) 21.519,7.109 21.605,7.195 21.919,6.881 21.919,6.518 22.546,5.891 22.546,2.012 24.198,0.36 29.412,0.36 29.549,0.498 31.251,0.498 31.388,0.36 34.612,0.36 34.712,0.46 38.582,0.46 38.696,0.346 44.202,0.346 44.215,0.333 47.862,0.333 47.875,0.346 78.61,0.346 85.578,7.314 85.578,47.664 v1(80.642,52.6) ; v1(21.6,9.6) 21.6,10.837 21.682,10.919 22.082,10.919 22.497,11.334 22.497,16.684 24.413,18.6 25.563,18.6 29.2,22.237 29.2,25.7 29.2,28 28.465,28.735 24.735,28.735 v1(24.6,28.6) 24.6,28.521 23.944,27.865 21.665,27.865 21.033,27.233 ; R26.1@22.2,32.25 22.2,30.2 22.346,30.054 22.6,30.054 22.854,29.8 v1(23,29.8) 23.553,29.8 23.942,30.189 28.139,30.189 R1.1@30.2,32.25
RST_EPS: EPS.4@71.26,62.549 EPS.31 J1.5 R8.1 R14.1 U5.11 | length 143.7
  Top Signal w0.254: v1@21.2,76.4 v1(21,76.6) v1(22.8,74.8)
  Bottom Signal w0.254: R14.1@14.55,43.6 14.75,43.4 15.4,43.4 ; EPS.31@19.6,43.4 15.4,43.4 ; U5.11@22.521,70.4 21.508,70.4 21.508,70.697 21.457,70.747 21.457,72.669 21.708,72.92 21.708,73.708 v1(22.8,74.8) ; R8.1@68.35,61.4 69.499,62.549 EPS.4@71.26,62.549 71.26,64.14 71.2,64.2 74.108,64.2 74.6,64.692 74.6,65.035 74.943,65.378 74.943,66.324 74.6,66.667 75.54,66.667 75.867,66.994 78.092,66.994 78.092,77.4 72.2,77.4 72.2,79.4 63.6,88 50.763,88 50.012,88.751 37.785,88.751 33.819,84.785 30.185,84.785 22.243,76.843 21.243,76.843 20.757,76.357 20.757,75.357 19.746,74.346 19.746,73.872 19.559,73.685 19.559,67.379 18.957,66.777 18.957,63.154 19.238,62.873 19.238,61.631 19.389,61.48 19.389,51.478 18.957,51.046 18.957,50.957 18.189,50.189 17.942,50.189 17.568,49.815 J1.5@16.74,49.815 16.725,49.8 16.2,49.8 16.2,49.298 15.4,48.498 15.4,43.4
RST_PAY: J1.15 P5.6 R9.1 R25.1 | length 218
  Top Signal w0.254: J1.15@14.2,46.64 13.959,46.881 10.334,46.881 9.919,46.466 9.919,43.886 10.373,43.432 10.373,42.359 9.946,41.932 9.946,38.309 9.519,37.882 9.519,37.318 10,36.837 10,33.721 11.524,32.197 11.524,31.087 11.019,30.582 11.019,30.018 11.418,29.619 11.581,29.619 12.6,28.6 18.319,28.6 18.6,28.881 21.081,28.881 v1(23,30.8) ; P5.6@62.2,45.05 63.45,45.05 64.6,46.2 R9.1@68.1,46.2 68.1,45.5 68.8,44.8 v1(69.2,44.8)
  Bottom Signal w0.254: v1(23,30.8) 27.8,30.8 27.8,32.05 R25.1@28,32.25 29,33.25 29,36.237 28.519,36.718 28.519,37.282 28.6,37.363 28.6,37.998 29.085,37.998 29.222,38.135 29.681,38.135 30.081,38.535 30.645,38.535 31.335,37.845 31.335,36.186 31.552,35.969 35.594,35.969 35.681,35.882 35.681,35.081 35.681,34.918 35.282,34.519 35.119,34.519 34.946,34.346 34.946,31.093 34.827,30.974 34.827,30.41 35.226,30.011 35.79,30.011 35.833,30.054 44.788,30.054 45.091,30.054 45.318,30.281 45.882,30.281 46.281,29.882 46.281,29.318 43.254,26.291 43.254,25.012 42.062,23.82 42.062,23.062 38.941,23.062 37.36,21.481 36.718,21.481 36.319,21.082 36.319,20.518 37.454,19.383 37.454,19.317 38.769,18.002 38.769,15.426 40.526,13.669 42.094,13.669 44.201,11.562 48.399,11.562 48.518,11.681 50.119,11.681 50.919,10.881 52.791,10.881 54.018,9.654 57.388,9.654 64.988,2.054 78.392,2.054 84.216,7.878 84.216,46.986 80.543,50.659 75.901,50.659 71.681,46.439 71.681,46.118 71.282,45.719 70.119,45.719 v1(69.2,44.8)
RXCAN: "OBC 32M1.7" R27.2 U2.9 | length 64.4
  Top Signal w0.254: v1(15,9.8) v1(17.4,9.8)
  Bottom Signal w0.254: R27.2@4.4,9.05 4.95,9.6 5.237,9.6 5.283,9.554 5.908,9.554 6.318,9.144 6.856,9.144 7.623,8.377 7.623,7.765 8.442,6.946 14.178,6.946 16.812,9.58 17.621,9.58 18.119,9.082 18.119,8.518 18.518,8.119 19.082,8.119 19.203,8.239 19.242,8.2 20.753,8.2 20.942,8.011 21.542,8.011 21.942,7.611 23.258,7.611 24.189,8.542 24.189,8.752 24.718,9.281 25.461,9.281 25.915,8.827 26.585,8.827 27.212,8.2 28.437,8.2 29.637,9.4 31.946,9.4 32.031,9.485 33.601,9.485 33.624,9.508 33.829,9.508 34.881,10.56 34.881,18.44 33.921,19.4 31.5,19.4 ; v1(15,9.8) 15.748,9.8 16.883,10.935 16.935,10.935 17.481,11.481 17.481,17.082 15.295,19.268 U2.9@15.295,20.479 ; 29.518,9.281 30.082,9.281
SCK_A: "OBC 32M1.12" OBC.2@73.86,57.191 | length 140.8
  Top Signal w0.254: v1(22.6,6.8) v1(22.6,9.2)
  Bottom Signal w0.254: v1(22.6,6.8) 22.8,7 23,6.8 23,2.2 24.386,0.814 29.223,0.814 29.361,0.952 31.439,0.952 31.577,0.814 34.423,0.814 34.561,0.952 35.739,0.952 35.777,0.914 38.623,0.914 38.661,0.952 38.733,0.952 38.884,0.8 44.191,0.8 44.196,0.806 44.385,0.806 44.404,0.787 47.396,0.787 47.409,0.8 78.422,0.8 85.124,7.502 85.124,47.476 80.681,51.919 80.36,51.919 79.961,52.318 79.961,52.639 76.552,56.048 75.927,56.048 74.784,57.191 OBC.2@73.86,57.191 ; v1(22.6,9.2) 22.6,9.355 22.845,9.6 22.883,9.562 23.481,10.16 23.481,11.034 23.405,11.11 23.405,13.2 ; 23.405,13.454 23.405,13.2 ; 27.6,17.1 27.6,15.4 27.4,15.2 25,15.2 24.627,14.827 24.215,14.827 23.405,14.017 23.405,13.2
TXCAN: "OBC 32M1.6" R29.2 U2.5 | length 74.8
  Top Signal w0.254: v1(34.2,10.842) v1(35.758,10.842)
  Bottom Signal w0.254: R29.2@8.4,8.25 8.433,8.217 8.433,7.833 8.4,7.8 8.8,7.4 13.99,7.4 17.071,10.481 17.123,10.481 17.296,10.654 17.509,10.654 17.763,10.4 19,10.4 19.2,10.6 ; U2.5@14.66,26.321 14.614,26.367 14.614,27.777 15.237,28.4 17.4,28.4 18.265,27.535 18.702,27.535 18.718,27.519 19.407,27.519 19.845,27.081 20.082,27.081 20.16,27.003 20.481,26.682 20.481,26.118 20.082,25.719 19.518,25.719 19.4,25.837 19.082,25.519 18.561,25.519 17.389,24.347 17.389,23.142 16.41,22.163 16.41,21.402 16.461,21.351 16.461,19.607 16.2,19.346 16.2,19.005 17.935,17.27 17.935,16.465 19.6,14.8 19.6,13.444 18.928,12.772 18.918,12.782 18.918,11.282 19.2,11 19.2,10.6 ; 31.5,20.2 33.763,20.2 35.465,18.498 35.465,11.135 v1(35.758,10.842) ; v1(34.2,10.842) 33.297,9.939 31.842,9.939 31.757,9.854 29.449,9.854 28.249,8.654 27.401,8.654 26.773,9.281 26.103,9.281 25.649,9.735 24.53,9.735 23.735,8.94 23.735,8.73 23.07,8.065 22.13,8.065 21.73,8.465 21.13,8.465 20.941,8.654 19.946,8.654 19.2,9.4 19.2,10.6
pads on no net: "DEP. SWITCH1." "DEP. SWITCH / RBF PIN1." "EPS PEX.19" "EPS PEX.20" "OBC 32M1.3" "OBC 32M1.13" "OBC 32M1.14" "OBC 32M1.15" "OBC 32M1.22" "OBC 32M1.25" "OBC 32M1.27" "OBC 32M1.29" "OBC 32M1.32" "OBC TX.3" "OBC TX.4" "Real Time Clock.3" "Real Time Clock.5" *1.1 *1.3 *1.5 *1.7 *1.8 *2.5 *2.6 *2.19 *2.20 *2.29 +BATT1. -BATT1. BT1.13 BT2.13 C39.2 Designator1.1 Designator1.2 Designator1.3 Designator1.4 EPS.13 EPS.14 EPS.15 EPS.17 EPS.24 EPS.25 EPS.26 EPS.27 EPS.29 J1.6 J1.10 J1.23 J1.24 P5. P5.1 P8. P9. P10. P11. U2.12 U2.13 U5.12 U5.13 U12.1
copper on no net: | length 118
  Top Signal w0.254: v1(20,9.6) v1@20.162,9.6 ; v1@20.2,9.562 20.2,9.8 20.681,10.281 22.156,10.281 22.518,9.919 23.324,9.919 23.443,9.8 30.358,9.8 30.412,9.854 31.979,9.854 32.095,9.737 32.472,9.737 32.588,9.854 32.817,9.854 33.519,10.556 33.519,11.124 33.918,11.523 36.04,11.523 36.439,11.124 36.439,9.761 v1(36.6,9.6) ; 23.2,11 v1(22.8,10.6) 22.925,10.475 23.962,10.475 24.118,10.319 24.682,10.319 24.838,10.475 32,10.475 32,11.563 33.918,13.481 36.682,13.481 38.228,11.935 41.135,11.935 41.2,12 v1(42.8,12)
  Bottom Signal w0.254: 9.4,28.15 12.708,28.15 13.577,29.019 13.577,31.8 ; 12.4,31.7 12.5,31.8 13.577,31.8 ; 19.6,42.6 17.481,42.6 17.481,41.85 17.565,41.766 17.565,41.202 17.166,40.803 16.159,40.803 15.881,41.081 15.118,41.081 14.708,40.671 14.708,39.363 12.919,37.574 12.919,36.913 13.146,36.686 13.146,36.066 13.577,35.635 13.577,31.8 ; v1(20,9.6) 20.2,9.8 20.2,10.358 20.361,10.519 20.361,11.465 20.508,11.612 20.508,12.313 21.069,12.874 21.069,17.659 20.528,18.2 19.964,18.2 19.885,18.279 18.945,18.279 18.933,18.267 18.769,18.431 18.7,18.431 17.823,19.309 17.823,21.649 18.751,22.578 18.751,23.783 19.125,24.157 19.646,24.157 19.689,24.2 22.9,24.2 ; v1(22.8,10.6) 22.951,10.751 22.951,15.951 23.269,16.269 23.569,16.269 24.4,17.1 ; 32.8,6.85 33.801,6.85 33.973,6.678 ; 33,5.705 33.973,6.678 ; v1(36.6,9.6) 36.705,9.6 36.8,9.505 36.4,9.505 36.176,9.281 35.318,9.281 34.454,8.417 34.454,8.091 33.973,7.61 33.973,6.678 ; v1(42.8,12) 43.692,11.108 46.892,11.108 48.242,9.758 48.242,8.121 49.054,7.309 49.054,5.871 49.42,5.505 51,5.505 ; 51,7.85 51.15,8
  other v1: 61.7,7.5 70.65,7.5 73.925,7.5 82.875,7.5 6.6,9.825 86.7,14.25 6.6,20.025 6.6,23.025 86.7,23.2 86.8,26.45 6.6,33.225 86.8,35.4 61.1,36.2 61.1,52.65 88.7,58.75 88.7,68.95 6,69.575 6,79.775
  other v4: 12.93,40.1 12.93,64.611

## Polygon pours and split planes (outlines as drawn)
no net on Multi-Layer (solid): 0.77,45.5
GND on Ground Plane (split plane): 95.38,0.51 0.51,0.51 0.51,89.66 95.38,89.66
+3V3 on Power Plane (split plane): 58.298,10.808 57.445,9.955 57.382,9.879 57.336,9.792 57.307,9.698 57.298,9.6 57.298,0.51 0.51,0.51 0.51,67.098 58.298,67.098
+PACK on Power Plane (split plane): 95.38,0.51 58.302,0.51 58.302,9.392 59.155,10.245 59.218,10.321 59.264,10.408 59.293,10.502 59.302,10.6 59.302,60.897 95.38,61.202
+5V on Power Plane (split plane): 95.38,62.207 59.302,61.902 59.302,67.6 59.293,67.698 59.264,67.792 59.218,67.879 59.155,67.955 59.079,68.018 58.992,68.064 58.898,68.093 58.8,68.102 0.51,68.102 0.51,89.66 95.38,89.66

## Other copper
Bottom Signal:
Power Plane (plane layer: these items are gaps in the copper):
  lines w0.254: 0,67.6 0,0 48.12,0 48.08,0.04
  lines w1: 0,67.6 58.8,67.6 58.8,10.6 57.8,9.6 57.8,0 ; 58.8,61.395 96.07,61.71

## Silkscreen, mask and mechanical layers (free items; w line width, h text height)
Top Overlay:
  text "PAY HERMETIC" at 65.6,51 h1.02 r270
Bottom Overlay:
  lines w0.254: 0.2,37.2 15.2,37.2 15.6,37.6 15.6,48.8 37.2,48.8 37.2,33.4 55.8,33.4 55.8,0 ; 40.2,78.4 39.8,78.4 13.8,78.4 14.2,78 14.2,49.8 14.4,49.6 37.2,49.6 37.2,56.2 40.2,56.2 40.2,78.4 ; 40.2,78.4 40.2,78.4 ; 50.2,68 50.2,84.6 68.6,84.6 68.6,76.8 68.8,76.6 84.2,76.6 84.2,80.4 84.4,80.6 94.6,80.6 94.8,80.4 94.8,57.4 79.4,57.4 79.4,67.8 64.6,67.8 64.6,63.4 64.4,63.6 56.8,63.6 57,63.8 57,68 50.2,68 ; 60,7.6 60,38.6 80.2,38.6 80.2,7.6 60,7.6
  text "Boost Converters" at 66.8,85.2 h1.02
  text "Power Sensors and Control" at 40.6,79 h1.02
  text "UART" at 76.6,60.6 h0.51 r90
  text "PGM" at 74.2,60.4 h0.51 r90
  text "On-Board Computer" at 55.2,33.8 h1.02
  text "!" at 97.4,32 h15.24 r90
  text "Buck Boost Converters" at 81.6,28.4 h1.02 r90
  text "HERON Mk II" at 93,23.8 h0.76 r90
  text "BUS PCB v1" at 94.2,23.8 h0.76 r90
BOARD OUTLINE:
  lines w0.254: 38,54.8 52,54.8 52,35.6 ; 38,54.8 38,54.8 ; 38,54.8 38,35.6 52,35.6 ; 52,35.6 52,35.6 ; 0,0 0,90.2 95.9,90.2 95.9,0 0,0

## Text inside footprints (layer, text, board x,y; h text height)
*1: Top Overlay "*" at 41.477,56.799 h0.5 r180; Mechanical 13 "*" at 41.477,56.799 h0.5 r180
*14: Top Overlay "*" at 36.878,64.546 h0.5 r90; Mechanical 13 "*" at 36.878,64.546 h0.5 r90
*22: Top Overlay "*" at 24.888,39.384 h0.5 r90; Mechanical 13 "*" at 24.888,39.384 h0.5 r90
EPS: Bottom Overlay "1" at 57.032,62.752 h0.5; Bottom Overlay "2" at 57.54,65.292 h0.5; Bottom Overlay "5" at 48.396,62.752 h0.5; Bottom Overlay "6" at 48.396,65.292 h0.5
OBC: Bottom Overlay "1" at 57.772,56.952 h0.5; Bottom Overlay "2" at 58.28,59.492 h0.5; Bottom Overlay "5" at 49.136,56.952 h0.5; Bottom Overlay "6" at 49.136,59.492 h0.5
"OBC TX": Top Overlay "EPS RX" at 78,36.8 h0.5 r90; Top Overlay "EPS TX" at 80.6,36.8 h0.5 r90; Top Overlay "7" at 90.908,51.844 h0.5 r90; Top Overlay "8" at 88.368,51.844 h0.5 r90
P2: Bottom Overlay "1" at 77.292,44.048 h0.5 r270; Bottom Overlay "2" at 79.832,43.54 h0.5 r270; Bottom Overlay "4" at 79.832,50.144 h0.5 r270; Bottom Overlay "3" at 77.292,50.144 h0.5 r270
P3: Top Overlay "OBC RX" at 88,55.8 h0.5; Top Overlay "OBC TX" at 80,50.2 h0.5 r90; Top Overlay "OBC RX" at 78,50.2 h0.5 r90; Top Overlay "1" at 86.708,51.168 h0.5 r90
P7: Bottom Overlay "1" at 77.352,38.968 h0.5 r270; Bottom Overlay "2" at 79.892,38.46 h0.5 r270; Bottom Overlay "4" at 79.892,45.064 h0.5 r270; Bottom Overlay "3" at 77.352,45.064 h0.5 r270